# EAGLE board lines (EAGLE 7.4.0)
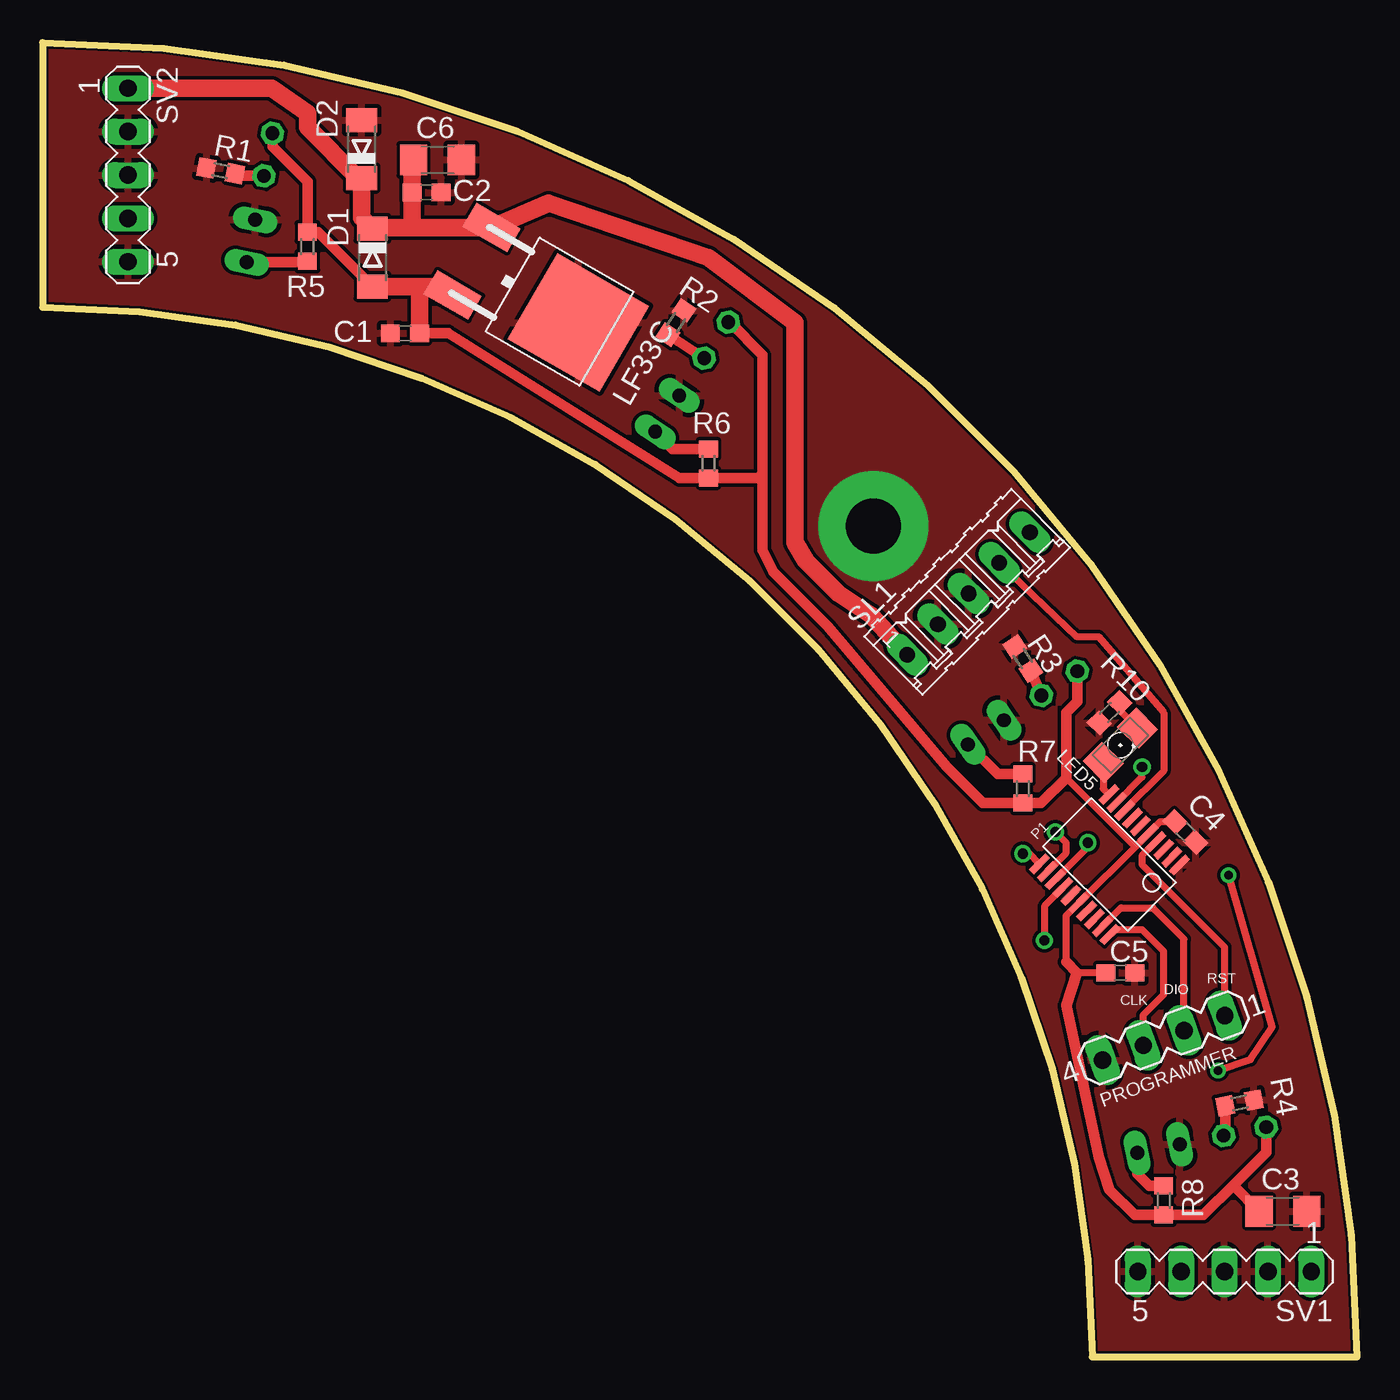
[diagram p0: board, top side]
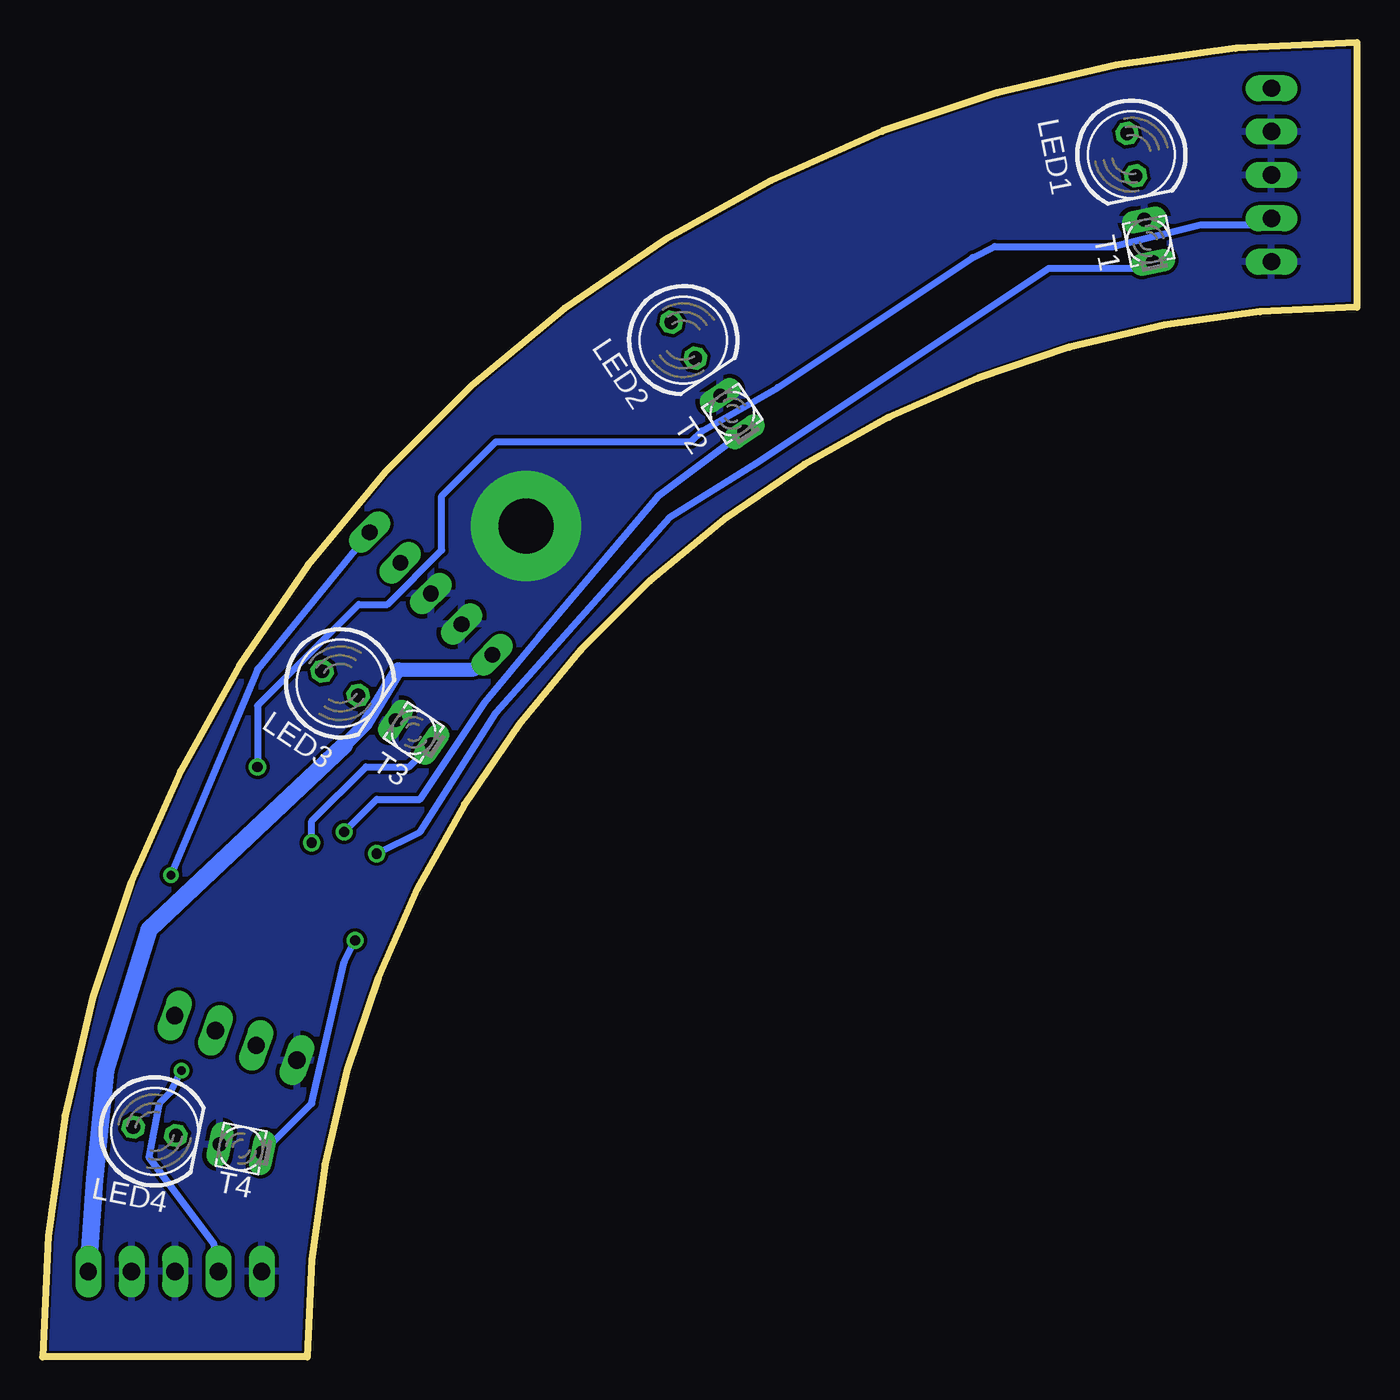
[diagram p1: board, bottom side, seen from below]

Size 76.99 x 76.99 mm. Coordinates in mm from the lower left corner, seen from the top.
Outline: 0,76.99 0,61.49 arc-90 61.49,0 76.99,0 arc90 0,76.99
Copper layers (1*16): Top 0.035mm / dielectric 1.5mm / Bottom 0.035mm
Design rules "default *": minimum track width 10mil, minimum drill 24mil, track to track 8mil, track to pad 8mil, pad to pad 8mil, via to via 8mil, smd to smd 8mil, copper to edge 5mil, drill to drill 8mil, minimum pad ring 10mil, minimum via ring 8mil, stop-mask expansion 4mil, vias tented up to drill 0mil, thermal gap 10mil

## Footprints (pad centres in the part's own frame; a part is rotated, then mirrored left to right if it is on the bottom)
C0603 = smd 1.1 x 1: 1 -0.85,0; 2 0.85,0
C1206 = smd 1.6 x 1.8: 1 -1.4,0; 2 1.4,0
MINIMELF = smd 1.4 x 1.8: A 1.7,0; C -1.7,0
LED5MM = drill 0.813 octagon: A -1.27,0; K 1.27,0
LED_1206 = smd 1.6 x 1.803: A -1.422,0; C 1.422,0
STM32F030F4 = smd 1.35 x 0.4: BOOT -2.875,2.925; NRST -2.875,0.975; PA0 -2.875,-0.325; PA1 -2.875,-0.975; PA2 -2.875,-1.625; PA3 -2.875,-2.275; PA4 -2.875,-2.925; PA5 2.875,-2.925; PA6 2.875,-2.275; PA7 2.875,-1.625; PA9 2.875,0.975; PA10 2.875,1.625; PA13 2.875,2.275; PA14 2.875,2.925; PB1 2.875,-0.975; PF0 -2.875,2.275; PF1 -2.875,1.625; VDD 2.875,0.325; VDDA -2.875,0.325; VSS 2.875,-0.325
MA04-1 = drill 1.016 long: 1 -3.81,0; 2 -1.27,0; 3 1.27,0; 4 3.81,0
R0603 = smd 1 x 1.1: 1 -0.85,0; 2 0.85,0
05P = drill 0.914 long: 1 -5.08,0; 2 -2.54,0; 3 0,0; 4 2.54,0; 5 5.08,0
MA05-1 = drill 1.016 long: 1 -5.08,0; 2 -2.54,0; 3 0,0; 4 2.54,0; 5 5.08,0
BPX81 = drill 0.813 long: C 1.27,0; E -1.27,0
LF33C = smd 1.6 x 3: 3V3 2.285,-7.18; VIN -2.285,-7.18 | smd 5.8 x 6.2: GND 0,0

## Placement (x,y rotation side)
C1  100k  [C0603]  21.23,59.96 180 top
C2  100k  [C0603]  22.5,68.22 0 top
C3  10u  [C1206]  72.66,8.53 0 top
C4  100K  [C0603]  66.94,30.75 315 top
C5  100K  [C0603]  63.14,22.5 0 top
C6  10u  [C1206]  23.13,70.12 0 top
D1  [MINIMELF]  19.32,64.41 270 top
D2  [MINIMELF]  18.68,70.75 90 top
LED1  [LED5MM]  13.21,70.43 281.3 bottom
LED2  [LED5MM]  39.46,59.56 303.7 bottom
LED3  [LED5MM]  59.56,39.46 326.2 bottom
LED4  [LED5MM]  70.43,13.21 348.7 bottom
LED5  [LED_1206]  63.14,35.83 45 top
P1  STM32F030F4  [STM32F030F4]  62.5,28.84 225 top
PROGRAMMER  [MA04-1]  65.67,18.68 200 top
R1  1K  [R0603]  10.43,69.48 348.8 top
R2  1K  [R0603]  37.1,60.59 236.3 top
R3  1K  [R0603]  57.42,40.91 303.8 top
R4  1K  [R0603]  70.12,14.88 191.3 top
R5  180K  [R0603]  15.51,65.04 90 top
R6  180K  [R0603]  39.01,52.34 270 top
R7  180K  [R0603]  57.42,33.29 270 top
R8  180K  [R0603]  65.67,9.16 270 top
R10  [R0603]  62.5,37.73 45 top
SL1  [05P]  54.24,44.72 45 top
SV1  [MA05-1]  69.24,5 180 top
SV2  [MA05-1]  5,69.24 270 top
T1  BPX81  [BPX81]  12.2,65.37 281.3 bottom
T2  BPX81  [BPX81]  36.59,55.26 303.7 bottom
T3  BPX81  [BPX81]  55.26,36.59 326.2 bottom
T4  BPX81  [BPX81]  65.37,12.2 348.7 bottom
U$1  LF33C  [LF33C]  31.38,60.59 240 top

## Library data of the parts
C1-C6 R1-R8 R10 = rcl
D1 D2 = diode
LED1-LED4 = led
LED5 = eagle-ltspice; SPICEMODEL: NONE; SPICEPREFIX: D; SPICETYPE: diode
P1 = stm32f030f4
PROGRAMMER SV1 SV2 = con-lstb; OC_FARNELL: unknown; OC_NEWARK: unknown
SL1 = con-amp-quick; OC_FARNELL: unknown; OC_NEWARK: unknown
T1-T4 = opto-trans-siemens; OC_FARNELL: unknown; OC_NEWARK: unknown
U$1 = regulator

## Nets
+3V3: C1.1 C3.1 C4.1 C5.1 D1.A LED1.A LED2.A LED3.A LED4.A P1.VDD P1.VDDA R5.2 R6.2 R7.2 R8.2 U$1.3V3
COM0: P1.PA3 SV2.4
FROM_MASTER: SL1.5 SV1.4
GND: C1.2 C2.2 C3.2 C4.2 C5.2 C6.2 D2.A P1.BOOT P1.VSS PROGRAMMER.4 R1.1 R2.1 R3.1 R4.1 R10.1 SL1.2 SL1.3 SV1.2 SV1.3 SV1.5 SV2.2 SV2.3 SV2.5 T1.E T2.E T3.E T4.E U$1.GND
N$1: LED1.K R1.2
N$2: LED2.K R2.2
N$3: LED3.K R3.2
N$4: LED4.K R4.2
N$12: LED5.C R10.2
N$13: LED5.A P1.PA4
RST: P1.NRST PROGRAMMER.1
S1: P1.PA5 R5.1 T1.C
S2: P1.PA6 R6.1 T2.C
S3: P1.PA7 R7.1 T3.C
S4: P1.PB1 R8.1 T4.C
SYS_SWCLK: P1.PA14 PROGRAMMER.3
SYS_SWDIO: P1.PA13 PROGRAMMER.2
TO_MASTER: P1.PA2 SL1.4
VCC: C2.1 C6.1 D1.C D2.C SL1.1 SV1.1 SV2.1 U$1.VIN

## Tracks (layer width: path | path; a pad name or v marks a point on that pad's centre or on a via)
+3V3
  Top 0.406: 59.96,23.13 59.96,25.84 P1.VDD 64,29.89 | 64,29.89 P1.VDDA 65.47,31.35 C4.1 | C5.1 60.59,22.5 | 59.96,33.92 64,29.89
  Top 0.61: LED2.A 40.25,60.62 42.18,58.69 42.18,51.7 | C1.1 23.77,59.96 37.31,51.49 R6.2 41.97,51.49 42.18,51.7 | 42.18,51.7 42.18,47.26 42.81,45.99 45.99,42.81 52.98,34.56 55.09,32.44 R7.2 58.48,32.44 59.96,33.92 59.96,37.73 60.62,38.39 LED3.A | LED4.A 71.67,11.98 69.8,10.11 | 69.8,10.11 68,8.31 R8.2 63.98,8.31 62.5,9.79 61.87,11.7 59.96,20.59 60.59,22.5 59.96,23.13 | D1.A 16.14,65.89 R5.2 15.51,68.85 13.46,70.9 LED1.A | C3.1 69.8,9.98 69.8,10.11
  Top 1.016: C1.1 22.07,62.49 21.86,62.7 | D1.A 21.86,62.7 | 21.86,62.7 23.53,62.7 U$1.3V3
COM0  (via drill 0.6)
  Top 0.406: P1.PA3 64.41,33.97 v64.41,34.56
  Bottom 0.406: v64.41,34.56 64.41,38.15 58.47,44.09 56.78,44.09 53.61,47.26 53.61,50.44 50.44,53.61 39.01,53.61 38.37,54.24 33.92,56.78 22.5,64.41 21.23,65.04 14.24,65.04 9.16,66.31 5.99,66.31 SV2.4
FROM_MASTER  (via drill 0.5)
  Top 0.406: v68.85,16.78 70.75,17.41 72.03,19.32 v69.48,28.21
  Bottom 0.406: SV1.4 66.94,6.62 70.75,11.7 70.12,14.88 69.48,15.51 v68.85,16.78 | v69.48,28.21 64.41,40.27 58.69,47.26 SL1.5
GND  (via drill 3.2 pad 6.45)
  other vias: 48.67,48.67
  pour Top: -6.08,80.28 -8.62,80.28 -8.62,14.24 -8.62,-2.27 79.01,-2.27 79.01,79.01 79.01,80.28
  pour Bottom: -12.43,82.82 -12.43,-7.35 84.09,-7.35 84.09,82.82 84.09,86.63 -12.43,86.63
N$1
  Top 0.61: LED1.K 11.4,69.19 R1.2
N$2
  Top 0.61: LED2.K R2.2
N$3
  Top 0.61: LED3.K R3.2
N$4
  Top 0.61: R4.2 69.29,13.06 LED4.K
N$12
  Top 0.406: LED5.C 63.1,37.88 R10.2
N$13
  Top 0.406: LED5.A 62.13,33.28 P1.PA4
RST
  Top 0.406: P1.NRST 64.41,29.37 64.41,28.84 69.25,24 PROGRAMMER.1
S1  (via drill 0.6)
  Top 0.406: P1.PA5 57.8,29.48 v57.42,29.48
  Top 0.61: T1.C 15.45,64.12 R5.1
  Bottom 0.406: v57.42,29.48 54.88,30.75 50.44,37.73 40.27,49.16 35.2,52.34 18.05,63.77 12.31,63.77 T1.C
S2  (via drill 0.6)
  Top 0.406: P1.PA6 59.96,29.52 59.96,30.11 v59.33,30.75
  Top 0.61: T2.C 36.9,53.19 R6.1
  Bottom 0.406: v59.33,30.75 57.42,32.66 54.88,32.66 51.07,38.37 47.9,42.18 40.91,50.44 T2.C
S3  (via drill 0.6)
  Top 0.406: P1.PA7 61.23,29.87 v61.23,30.11
  Top 0.61: T3.C 55.95,34.14 R7.1
  Bottom 0.406: v61.23,30.11 61.23,31.38 58.05,34.56 55.53,34.56 T3.C
S4  (via drill 0.6)
  Top 0.406: P1.PB1 58.69,26.41 v58.69,24.4
  Top 0.61: R8.1 64.83,10.01 64.12,10.71 T4.C
  Bottom 0.406: T4.C 61.23,14.85 59.33,23.13 v58.69,24.4
SYS_SWCLK
  Top 0.406: PROGRAMMER.3 64.48,20.03 65.67,21.23 65.67,23.77 64.41,25.04 62.83,25.04 P1.PA14
SYS_SWDIO
  Top 0.406: PROGRAMMER.2 66.87,24.48 65.04,26.3 63.18,26.3 P1.PA13
TO_MASTER
  Top 0.406: P1.PA2 65.67,34.32 65.67,37.73 61.87,42.18 60.59,42.18 SL1.4
VCC
  Top 1.016: SV2.1 13.42,74.32 15.51,72.86 15.51,72.03 18.48,69.06 D2.C 18.68,66.74 D1.C 19.38,66.16 21.86,66.16 | SL1.1 48.53,43.45 46.62,44.72 44.72,46.62 44.09,47.7 44.09,60.59 39.01,64.41 29.63,67.58 U$1.VIN 21.86,66.16 | C6.1 21.64,70.03 C2.1 21.64,66.38 21.86,66.16
  Bottom 0.813: 59.33,35.83 58.05,37.1 56.15,40.27 51.7,40.27 SL1.1
  Bottom 1.016: SV1.1 73.93,10.43 73.3,16.78 70.75,25.04 59.33,35.83

## Text on the board
tNames: RST | CLK | DIO